# EAGLE board buck_converters (EAGLE 9.6.2)
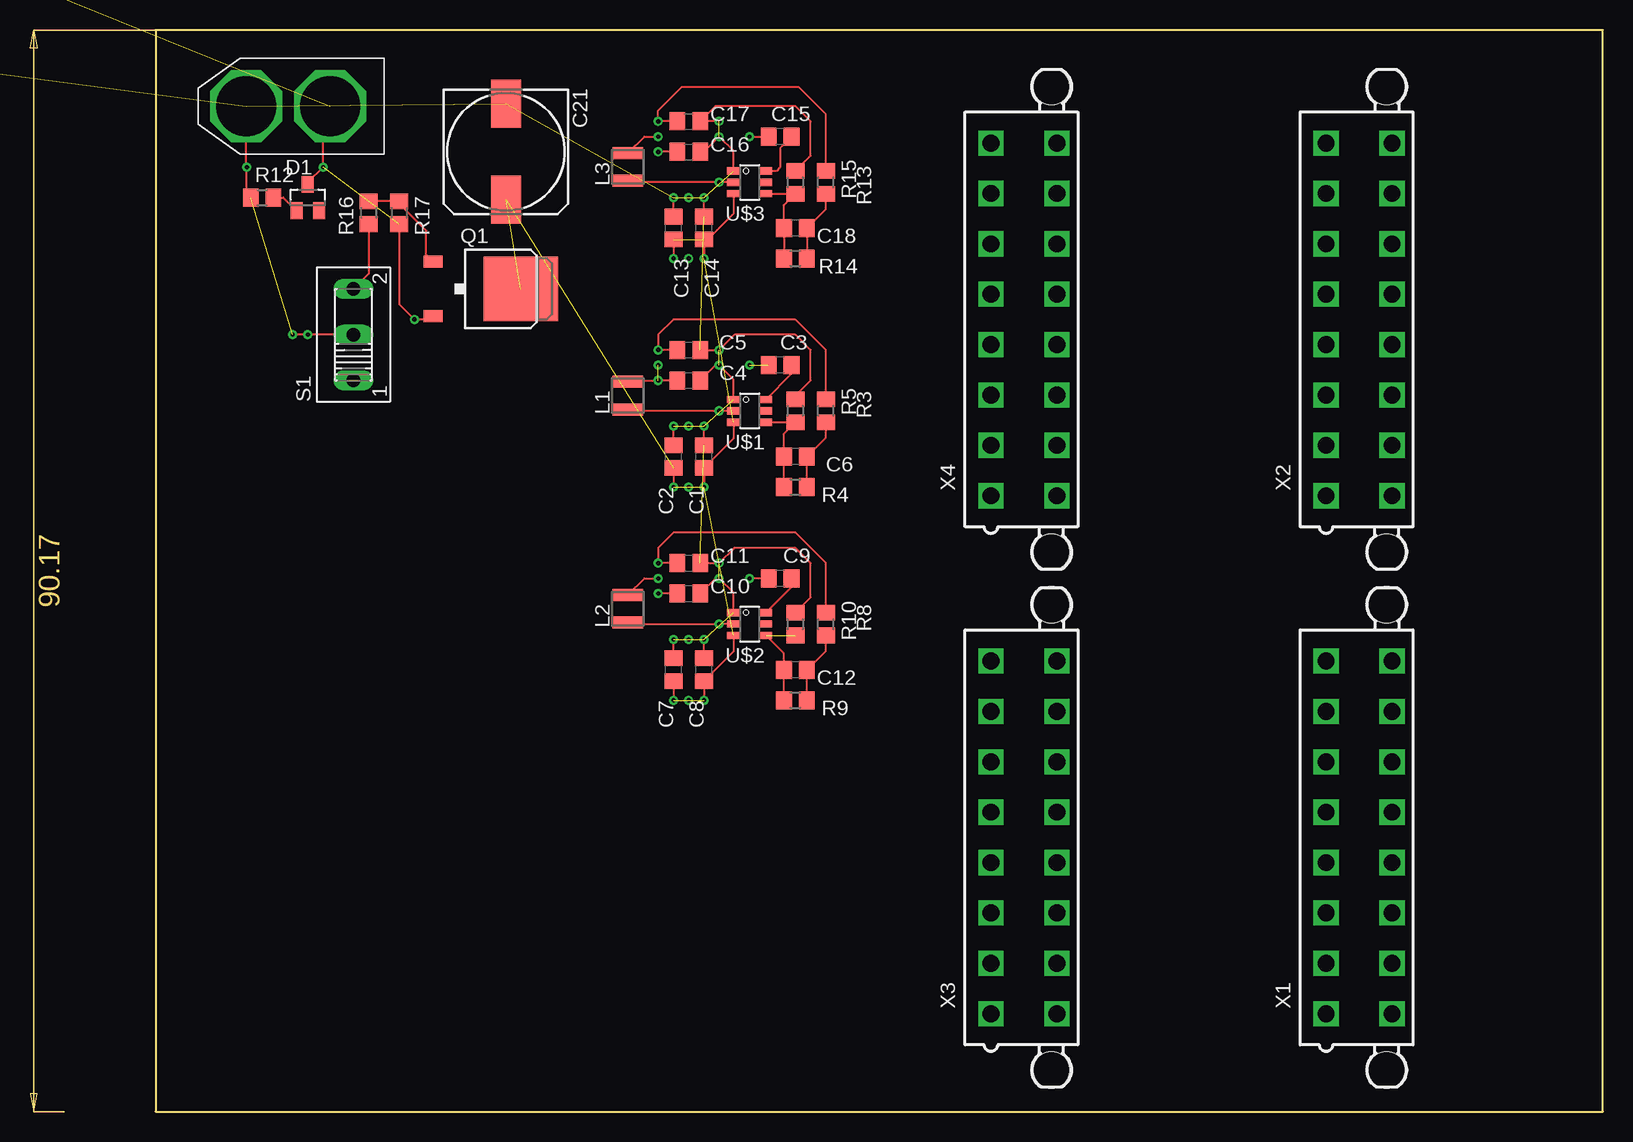
[diagram p0: board, top side]
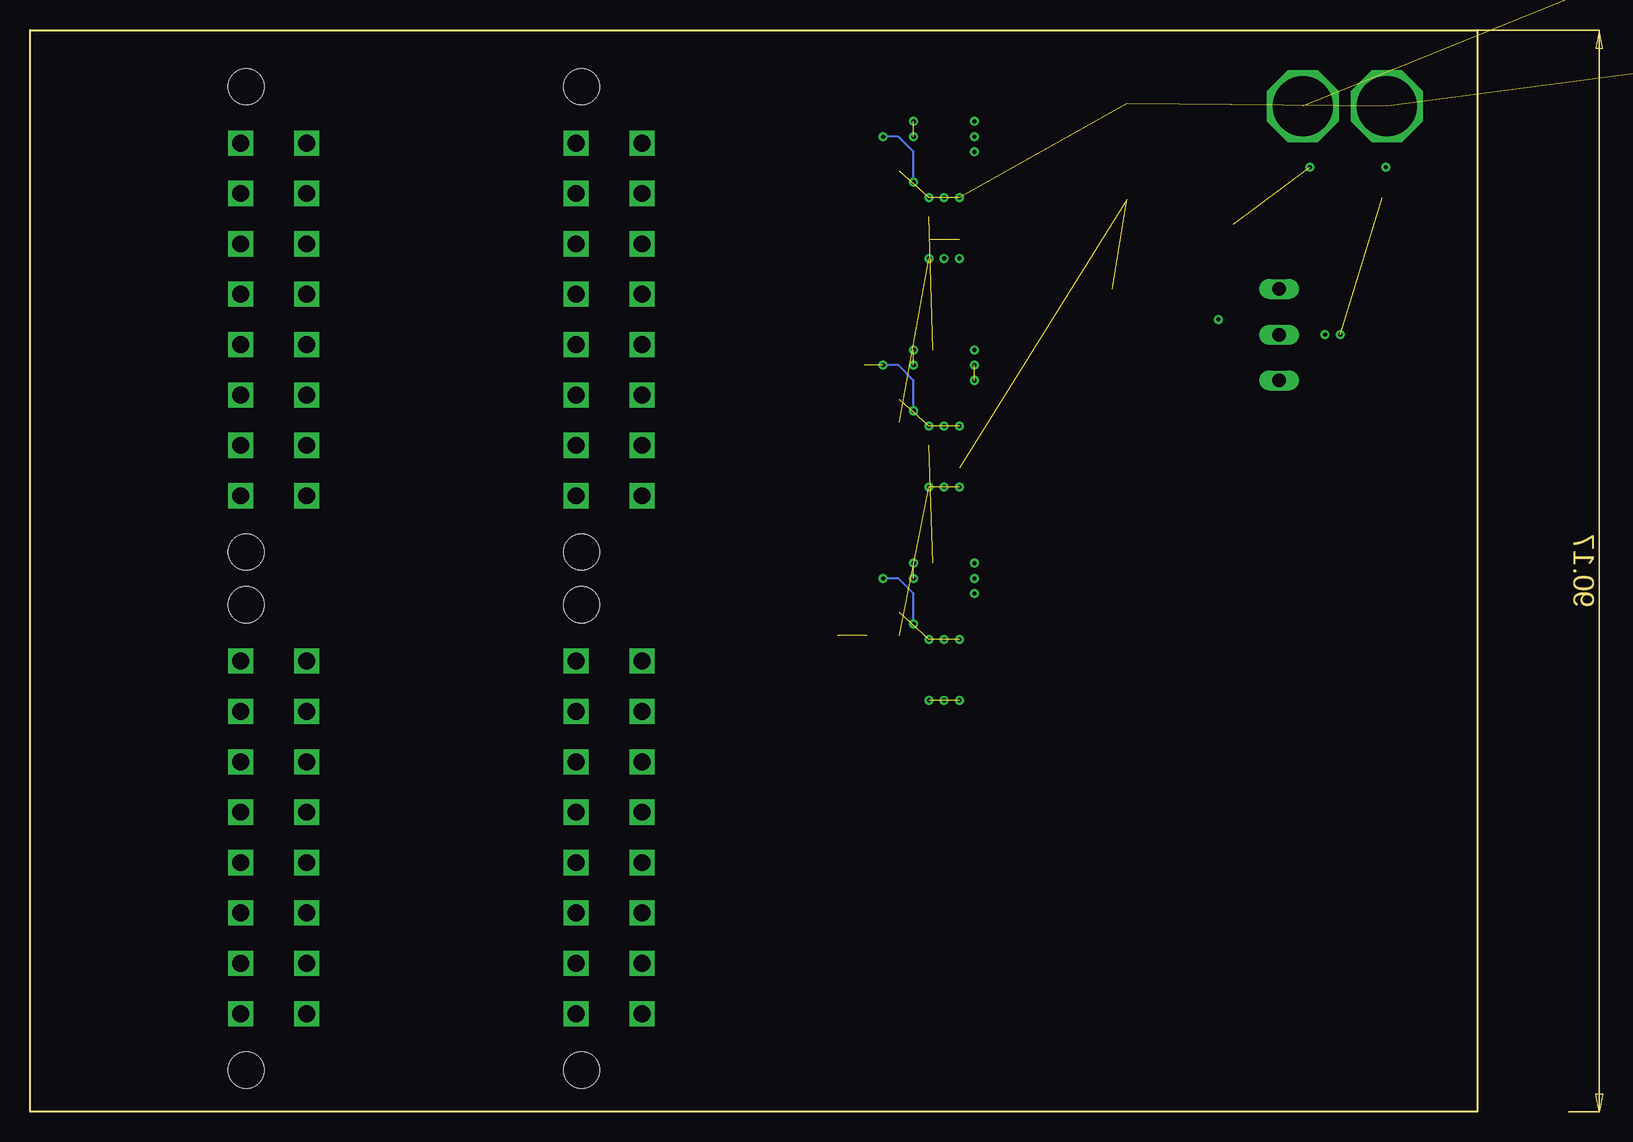
[diagram p1: board, bottom side, seen from below]

Size 120.65 x 90.17 mm. Coordinates in mm from the lower left corner, seen from the top.
Outline: 0,90.17 0,0 120.65,0 120.65,90.17 0,90.17
Copper layers (1*16): Top 0.035mm / dielectric 1.5mm / Bottom 0.035mm
Design rules "default": minimum track width 6mil, minimum drill 0.35mm, track to track 6mil, track to pad 6mil, pad to pad 6mil, via to via 6mil, smd to smd 6mil, copper to edge 40mil, drill to drill 6mil, minimum pad ring 10mil, minimum via ring 8mil, stop-mask expansion 4mil, vias tented up to drill 0mil, thermal gap 10mil

## Footprints (pad centres in the part's own frame; a part is rotated, then mirrored left to right if it is on the bottom)
C0805 = smd 1.3 x 1.5: 1 -0.95,0; 2 0.95,0
0805 = smd 1.3 x 1.5: 1 -0.95,0; 2 0.95,0
153CLV-1010 = smd 4 x 2.5: + 4,0; - -4,0
SOT23 = smd 1 x 1.4: 1 -0.95,-1.1; 2 0.95,-1.1; 3 0,1.1
1X2-3.5MM = drill 1 pad 2.184: 1 1.8,0; 2 -1.7,0
1X06_ROUND_70 = drill 1 pad 1.778: 1 -6.35,0; 2 -3.81,0; 3 -1.27,0; 4 1.27,0; 5 3.81,0; 6 6.35,0
SM-NE29 = smd 1 x 2.54: 1 -1.15,0; 2 1.15,0
D-PAK_TO252AA = smd 1 x 1.6: 1 -2.28,-4.8; 3 2.28,-4.8 | smd 5.4 x 6.2: 4 0,2.5
R0805 = smd 1.3 x 1.5: 1 -0.95,0; 2 0.95,0
2512 = smd 1.8 x 3.2: 1 -2.8,0; 2 2.8,0
255SB = drill 1.118 long: 1 -3.81,0; 2 0,0; 3 3.81,0
SOLDERJUMPER_REFLOW_NOPASTE = smd 1.168 x 1.6: 1 -0.762,0; 2 0.762,0
SOT23-8 = smd 0.4 x 1.2: 1 -0.975,-1.3; 2 -0.325,-1.3; 3 0.325,-1.3; 4 0.975,-1.3; 5 0.975,1.3; 6 0.325,1.3; 7 -0.325,1.3; 8 -0.975,1.3
SOT23-6 = smd 0.6 x 1.05: 1 -0.95,-1.35; 2 0,-1.35; 3 0.95,-1.35; 4 0.95,1.35; 5 0,1.35; 6 -0.95,1.35
XT60 = drill 5 octagon: + 4.5,0; - 11.5,0
5566-16 = drill 1.4 square: 1 14.7,-2.75; 2 10.5,-2.75; 3 6.3,-2.75; 4 2.1,-2.75; 5 -2.1,-2.75; 6 -6.3,-2.75; 7 -10.5,-2.75; 8 -14.7,-2.75; 9 14.7,2.75; 10 10.5,2.75; 11 6.3,2.75; 12 2.1,2.75; 13 -2.1,2.75; 14 -6.3,2.75; 15 -10.5,2.75; 16 -14.7,2.75 | hole 3: 19.4,2.29; -19.4,2.29

## Placement (x,y rotation side)
C1  10uF  [C0805]  45.72,54.61 90 top
C2  0.1uF  [C0805]  43.18,54.61 90 top
C3  0.1uF  [C0805]  52.07,62.23 180 top
C4  22uF  [C0805]  44.45,60.96 0 top
C5  22uF  [C0805]  44.45,63.5 0 top
C6  75pF  [C0805]  53.34,54.61 180 top
C7  10uF  [C0805]  43.18,36.83 90 top
C8  0.1uF  [C0805]  45.72,36.83 90 top
C9  0.1uF  [C0805]  52.07,44.45 180 top
C10  22uF  [C0805]  44.45,43.18 0 top
C11  22uF  [C0805]  44.45,45.72 0 top
C12  100pF  [C0805]  53.34,36.83 180 top
C13  10uF  [C0805]  43.18,73.66 90 top
C14  0.1uF  [C0805]  45.72,73.66 90 top
C15  0.1uF  [C0805]  52.07,81.28 180 top
C16  22uF  [C0805]  44.45,80.01 0 top
C17  22uF  [C0805]  44.45,82.55 0 top
C18  75pF  [C0805]  53.34,73.66 180 top
C19  0.1µF  [0805]  -67.31,90.17 0 top  (outside the outline)
C21  [153CLV-1010]  29.21,80.01 270 top
D1  BAS40  [SOT23]  12.7,76.2 0 top
J1  TERMBLOCK_1X2-3.5MM  [1X2-3.5MM]  -39.37,59.69 0 top  (outside the outline)
JP1  [1X06_ROUND_70]  -36.83,90.17 0 top  (outside the outline)
L1  10uH  [SM-NE29]  39.37,59.69 90 top
L2  15uH  [SM-NE29]  39.37,41.91 90 top
L3  10uH  [SM-NE29]  39.37,78.74 90 top
Q1  IRFR5305  [D-PAK_TO252AA]  27.94,68.58 270 top
R1  10K  [0805]  -73.66,90.17 0 top  (outside the outline)
R2  10K  [0805]  -80.01,90.17 0 top  (outside the outline)
R3  49.9R  [R0805]  55.88,58.42 90 top
R4  100K  [R0805]  53.34,52.07 0 top
R5  11K  [R0805]  53.34,58.42 270 top
R6  10K  [0805]  -17.78,96.52 0 top  (outside the outline)
R7  10K  [0805]  -24.13,96.52 0 top  (outside the outline)
R8  49.9R  [R0805]  55.88,40.64 90 top
R9  100K  [R0805]  53.34,34.29 0 top
R10  5.23K  [R0805]  53.34,40.64 270 top
R11  0.01/1% (PT2512FK-070R1L)  [2512]  -25.4,91.44 0 top  (outside the outline)
R12  10K  [R0805]  8.89,76.2 0 top
R13  49.9R  [R0805]  55.88,77.47 90 top
R14  100K  [R0805]  53.34,71.12 0 top
R15  13.3K  [R0805]  53.34,77.47 270 top
R16  10K  [R0805]  17.78,74.93 90 top
R17  10K  [R0805]  20.32,74.93 270 top
S1  [255SB]  16.51,64.77 90 top
SJ1  [SOLDERJUMPER_REFLOW_NOPASTE]  -54.61,90.17 0 top  (outside the outline)
SJ2  [SOLDERJUMPER_REFLOW_NOPASTE]  -59.69,90.17 0 top  (outside the outline)
U1  [SOT23-8]  -49.53,91.44 0 top  (outside the outline)
U$1  TPS54302  [SOT23-6]  49.53,58.42 270 top
U$2  TPS54302  [SOT23-6]  49.53,40.64 270 top
U$3  TPS54302  [SOT23-6]  49.53,77.47 270 top
U$9  XT60  [XT60]  19.05,83.82 180 top
X1  5566-16  [5566-16]  100.33,22.86 270 top
X2  5566-16  [5566-16]  100.33,66.04 270 top
X3  5566-16  [5566-16]  72.39,22.86 270 top
X4  5566-16  [5566-16]  72.39,66.04 270 top

## Library data of the parts
C1-C18 C21 = rcl; SPICEPREFIX: C
C19 J1 JP1 R1 R2 R6 R7 R11 SJ1 SJ2 = microbuilder
D1 = diode
L1-L3 = inductor-neosid; OC_FARNELL: unknown; OC_NEWARK: unknown
Q1 = transistor-power
R3-R5 R8-R10 R12-R17 = rcl; SPICEPREFIX: R
S1 = switch
U1 = INA219
U$1-U$3 = TPSxxxxxx-buck-regulators
U$9 = XT60
X1-X4 = con-molex; MF: MOLEX; OC_FARNELL: unknown; OC_NEWARK: unknown

## Nets
5V: C16.1 C17.1 L3.2 R13.2
6V: C4.1 C5.1 L1.2 R3.2
12V: C10.1 C11.1 L2.2 R8.2
EN_5V: U$3.5
EN_6V: U$1.5
EN_12V: U$2.5
GND: C1.2 C2.2 C4.2 C5.2 C7.2 C8.2 C10.2 C11.2 C13.2 C14.2 C16.2 C17.2 C19.2 C21.- JP1.2 R1.1 R2.1 R5.1 R10.1 R12.1 R15.1 S1.2 U1.3 U$1.1 U$2.1 U$3.1 U$9.-
N$1: C6.1 R3.1 R4.2
N$2: C6.2 R4.1 R5.2 U$1.4
N$3: R2.2 SJ2.2 U1.8
N$4: C3.1 U$1.6
N$5: C3.2 L1.1 U$1.2
N$6: C12.1 R8.1 R9.2
N$7: C12.2 R9.1 R10.2 U$2.4
N$8: R1.2 SJ1.2 U1.7
N$9: C9.1 U$2.6
N$10: C9.2 L2.1 U$2.2
N$11: C18.1 R13.1 R14.2
N$12: C18.2 R14.1 R15.2 U$3.4
N$14: C15.1 U$3.6
N$15: C15.2 L3.1 U$3.2
N$16: D1.1 R12.2
N$17: R16.1 S1.3
N$18: Q1.1 R16.2 R17.1
SCL: JP1.3 R6.1 U1.5
SDA: JP1.4 R7.1 U1.6
VCC: C19.1 D1.3 JP1.1 Q1.3 R6.2 R7.2 R17.2 SJ1.1 SJ2.1 U1.4 U$9.+
VIN: C1.1 C2.1 C7.1 C8.1 C13.1 C14.1 C21.+ Q1.4 U$1.3 U$2.3 U$3.3
VIN+: J1.2 JP1.6 R11.2 U1.1
VIN-: J1.1 JP1.5 R11.1 U1.2

## Tracks (layer width: path | path; a pad name or v marks a point on that pad's centre or on a via)
5V  (via drill 0.35)
  Top 0.152: C17.1 v41.91,82.55 41.91,83.46 43.85,85.39 53.65,85.39 55.88,83.16 R13.2 56.19,78.72 | C16.1 v41.91,80.01 | L3.2 40.76,81.28 v41.91,81.28
6V  (via drill 0.35)  (1 unrouted)
  Top 0.152: L1.2 39.49,60.96 v41.91,60.96 C4.1 | C5.1 v41.91,63.5 41.91,64.77 43.18,66.04 53.34,66.04 55.88,63.5 R3.2
  other vias: 41.91,62.23
12V  (via drill 0.35)
  Top 0.152: L2.2 40.76,44.45 v41.91,44.45 | C10.1 v41.91,43.18 | C11.1 v41.91,45.72 41.91,46.99 43.18,48.26 53.34,48.26 55.88,45.72 R8.2
GND  (via drill 0.35)  (22 unrouted)
  Top 0.152: U$3.1 48.18,80.09 v46.99,81.28 45.72,80.01 C16.2 | R15.1 54.61,79.69 54.61,82.55 53.34,83.82 46.67,83.82 C17.2 v46.99,82.55 | C13.2 v43.18,76.2 | C14.2 v45.72,76.2 | C5.2 v46.99,63.5 48.26,64.77 53.34,64.77 54.61,63.5 54.61,60.96 53.34,59.69 R5.1 | C4.2 46.67,62.23 v46.99,62.23 48.18,61.04 U$1.1 | C2.2 v43.18,57.15 | C1.2 v45.72,57.15 | C11.2 v46.99,45.72 48.26,46.99 53.34,46.99 54.61,45.72 54.61,42.86 R10.1 | C10.2 46.67,44.45 v46.99,44.45 48.18,43.26 U$2.1 | C7.2 v43.18,39.37 | C8.2 v45.72,39.37 | 7.55,76.59 R12.1 7.62,76.52 v7.62,78.74 7.55,78.81 U$9.- | S1.2 v12.7,64.77 v11.43,64.77
  other vias: 44.45,76.2 44.45,57.15 44.45,39.37
N$1
  Top 0.152: R4.2 C6.1 55.88,56.2 R3.1
N$2
  Top 0.152: R4.1 C6.2 | C6.2 52.39,55.25 | U$1.4 R5.2 52.39,56.52 C6.2
N$3  (2 unrouted)
N$4
  Top 0.152: U$1.6 53.02,61.51 C3.1
N$5  (via drill 0.35)  (1 unrouted)
  Top 0.152: U$1.2 v46.99,58.42 39.49,58.42 L1.1
  Bottom 0.152: v46.99,58.42 46.99,60.96 48.26,62.23 v49.53,62.23
N$6
  Top 0.152: R9.2 C12.1 55.88,38.42 R8.1
N$7  (1 unrouted)
  Top 0.152: R9.1 C12.2 52.39,38.18 U$2.4
N$8  (2 unrouted)
N$9
  Top 0.152: C9.1 53.02,43.73 U$2.6
N$10  (via drill 0.35)
  Top 0.152: C9.2 v49.53,44.45 | U$2.2 v46.99,40.64 39.49,40.64 L2.1
  Bottom 0.152: v46.99,40.64 46.99,43.18 48.26,44.45 v49.53,44.45
N$11
  Top 0.152: R13.1 55.88,75.25 C18.1 R14.2
N$12
  Top 0.152: R14.1 C18.2 52.39,75.57 R15.2 U$3.4
N$14
  Top 0.152: C15.1 52.07,80.33 52.07,78.74 51.75,78.42 U$3.6
N$15  (via drill 0.35)
  Top 0.152: U$3.2 v46.99,77.47 39.49,77.47 L3.1 | v49.53,81.28 C15.2
  Bottom 0.152: v46.99,77.47 46.99,80.01 48.26,81.28 v49.53,81.28
N$16
  Top 0.152: R12.2 10.65,76.2 D1.1
N$17
  Top 0.152: R16.1 17.78,69.85 S1.3
N$18
  Top 0.152: Q1.1 22.57,71.43 22.57,73.45 20.32,75.7 R17.1 R16.2
N$19  (via drill 0.35)
  other vias: 44.45,71.12
SCL  (2 unrouted)
SDA  (2 unrouted)
VCC  (via drill 0.35)  (8 unrouted)
  Top 0.152: D1.3 12.7,77.47 v13.97,78.74 13.97,83.24 U$9.+ | Q1.3 22.88,66.04 v21.59,66.04 20.32,67.31 R17.2
VIN  (via drill 0.35)  (9 unrouted)
  Top 0.152: C13.1 v43.18,71.12 | C14.1 45.72,72.39 | 45.72,72.39 v45.72,71.12 | U$3.3 48.18,74.85 45.72,72.39 | U$1.3 48.18,56.12 C1.1 v45.72,52.07 | C2.1 v43.18,52.07 | U$2.3 48.18,38.34 C8.1 v45.72,34.29 | C7.1 v43.18,34.29
  other vias: 44.45,52.07 44.45,34.29
VIN+  (3 unrouted)
VIN-  (3 unrouted)